# EAGLE board Ex 16 extra gpio 74HC595 (EAGLE 7.6.0)

Size 33 x 33.7 mm. Coordinates in mm from the lower left corner, seen from the top.
Outline: 0,0 33,0 33,33.7 0,33.7 0,0
Copper layers (1*16): Top 0.035mm / dielectric 1.5mm / Bottom 0.035mm
Design rules "default": minimum track width 10mil, minimum drill 24mil, track to track 8mil, track to pad 8mil, pad to pad 8mil, via to via 8mil, smd to smd 8mil, copper to edge 40mil, drill to drill 8mil, minimum pad ring 10mil, minimum via ring 8mil, stop-mask expansion 4mil, vias tented up to drill 0mil, thermal gap 10mil

## Footprints (pad centres in the part's own frame; a part is rotated, then mirrored left to right if it is on the bottom)
C025-030X050 = drill 0.813 pad 1.422 octagon: 1 -1.27,0; 2 1.27,0
1X10-BIG = drill 1.016 pad 1.778 octagon: 1 -11.43,0; 2 -8.89,0; 3 -6.35,0; 4 -3.81,0; 5 -1.27,0; 6 1.27,0; 7 3.81,0; 8 6.35,0; 9 8.89,0; 10 11.43,0
DIL16 = drill 0.813 long: 1 -8.89,-3.81; 2 -6.35,-3.81; 3 -3.81,-3.81; 4 -1.27,-3.81; 5 1.27,-3.81; 6 3.81,-3.81; 7 6.35,-3.81; 8 8.89,-3.81; 9 8.89,3.81; 10 6.35,3.81; 11 3.81,3.81; 12 1.27,3.81; 13 -1.27,3.81; 14 -3.81,3.81; 15 -6.35,3.81; 16 -8.89,3.81

## Placement (x,y rotation side)
C_100MF  [C025-030X050]  14,11 270 top
GPIO_7_3  PINHD-1X10  [1X10-BIG]  13,29.2 180 top
GPIO_15_8  PINHD-1X10  [1X10-BIG]  13,32 180 top
GPIO_16_23  PINHD-1X10  [1X10-BIG]  31.5,18 90 top
NUSBIO_IN  PINHD-1X10  [1X10-BIG]  13.33,1.5 180 top
SR0  74HC595N  [DIL16]  5.5,16 90 top
SR1  74HC595N  [DIL16]  21.5,15.9 90 top

## Library data of the parts
C_100MF GPIO_7_3 GPIO_15_8 GPIO_16_23 NUSBIO_IN = adafruit
SR0 SR1 = 74xx-eu

## Nets
DATA_OUT: NUSBIO_IN.2 SR0.14
GND: C_100MF.1 GPIO_7_3.10 GPIO_15_8.10 GPIO_16_23.10 NUSBIO_IN.10 SR0.8 SR0.13 SR1.8 SR1.13
GPIO3: GPIO_7_3.4 NUSBIO_IN.4
GPIO4: GPIO_7_3.5 NUSBIO_IN.5
GPIO5: GPIO_7_3.6 NUSBIO_IN.6
GPIO6: GPIO_7_3.7 NUSBIO_IN.7
GPIO7: GPIO_7_3.8 NUSBIO_IN.8
LATCH: NUSBIO_IN.3 SR0.12 SR1.12
N$1: GPIO_15_8.1 SR0.15
N$2: GPIO_15_8.2 SR0.1
N$3: GPIO_15_8.3 SR0.2
N$4: GPIO_15_8.4 SR0.3
N$5: GPIO_15_8.5 SR0.4
N$6: GPIO_15_8.6 SR0.5
N$7: GPIO_15_8.7 SR0.6
N$8: GPIO_15_8.8 SR0.7
N$9: SR0.9 SR1.14
N$10: GPIO_16_23.1 SR1.15
N$11: GPIO_16_23.2 SR1.1
N$12: GPIO_16_23.3 SR1.2
N$13: GPIO_16_23.4 SR1.3
N$14: GPIO_16_23.5 SR1.4
N$15: GPIO_16_23.6 SR1.5
N$16: GPIO_16_23.7 SR1.6
N$17: GPIO_16_23.8 SR1.7
SCK: NUSBIO_IN.1 SR0.11 SR1.11
VCC: C_100MF.2 GPIO_7_3.9 GPIO_15_8.9 GPIO_16_23.9 NUSBIO_IN.9 SR0.10 SR0.16 SR1.10 SR1.16

## Tracks (layer width: path | path; a pad name or v marks a point on that pad's centre or on a via)
DATA_OUT  (1 unrouted)
GND  (8 unrouted)
GPIO3  (1 unrouted)
GPIO4  (1 unrouted)
GPIO5  (1 unrouted)
GPIO6  (1 unrouted)
GPIO7  (1 unrouted)
LATCH  (2 unrouted)
N$1  (1 unrouted)
N$2  (1 unrouted)
N$3  (1 unrouted)
N$4  (1 unrouted)
N$5  (1 unrouted)
N$6  (1 unrouted)
N$7  (1 unrouted)
N$8  (1 unrouted)
N$9  (1 unrouted)
N$10  (1 unrouted)
N$11  (1 unrouted)
N$12  (1 unrouted)
N$13  (1 unrouted)
N$14  (1 unrouted)
N$15  (1 unrouted)
N$16  (1 unrouted)
N$17  (1 unrouted)
SCK  (2 unrouted)
VCC  (8 unrouted)

## Text on the board
tNames: GND | GND | VCC | 7 | 6 | 5 | 4 | 3 | VCC | 23 | 22 | 21 | 20 | 19 | 18 | 17 | + | 16 | GND | VCC | 7 | 6 | 5 | 4 | 3 | LAT | DTA | SCK
bNames: 16 GPIO Extension | MadeInTheUSB.net | PCBv1 2017.06